# Altium PCB motherboard_PCB.PcbDoc
Units mm, origin at the board's own origin, x right, y up, seen from the top; angles counter-clockwise.
Board outline 96.01 x 77.72 mm, 2 copper layers (Top Layer, Bottom Layer); 77 components, 71 nets, 483 pads, 30 vias.
Unrouted connection lines stored in the file: 98.
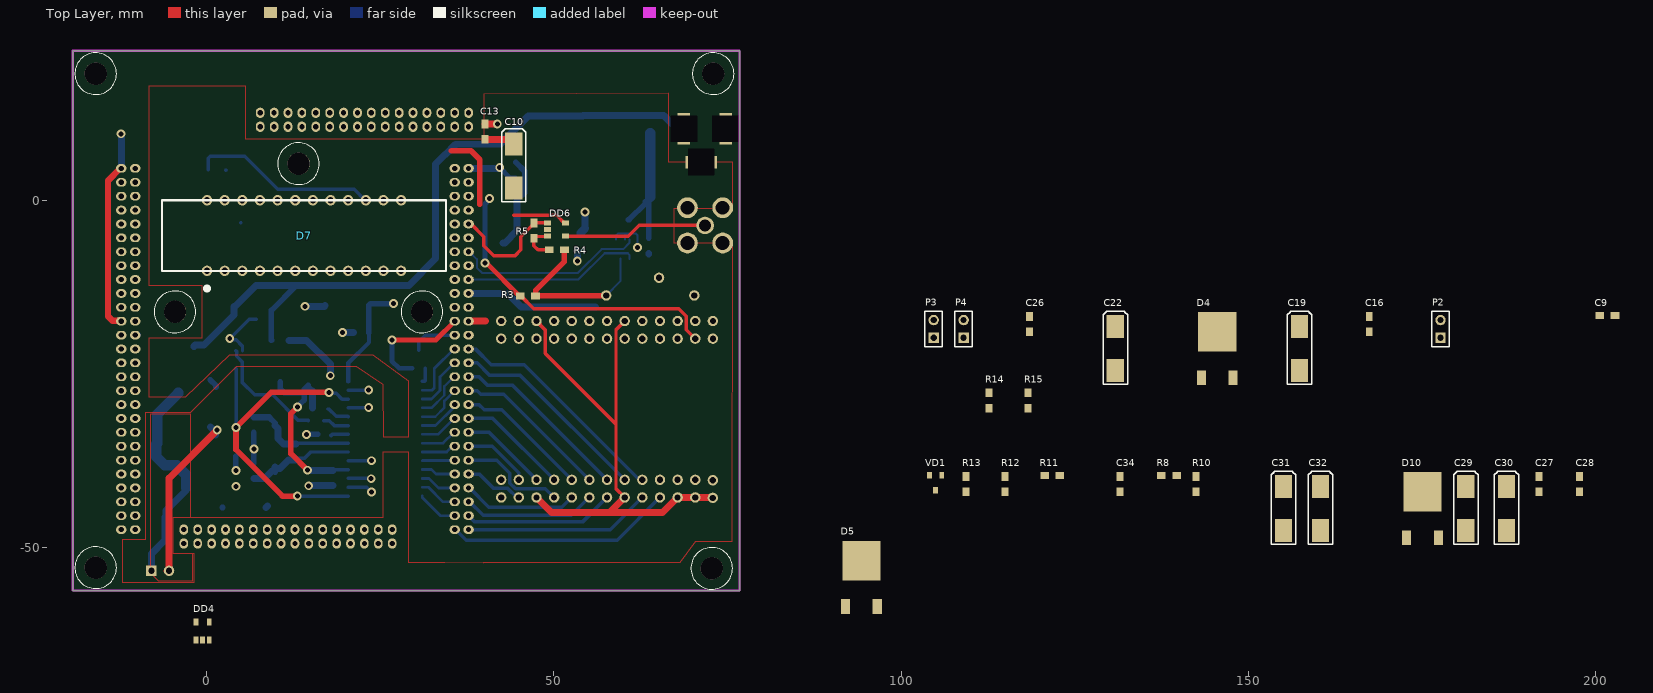
[diagram p0: Top Layer view]
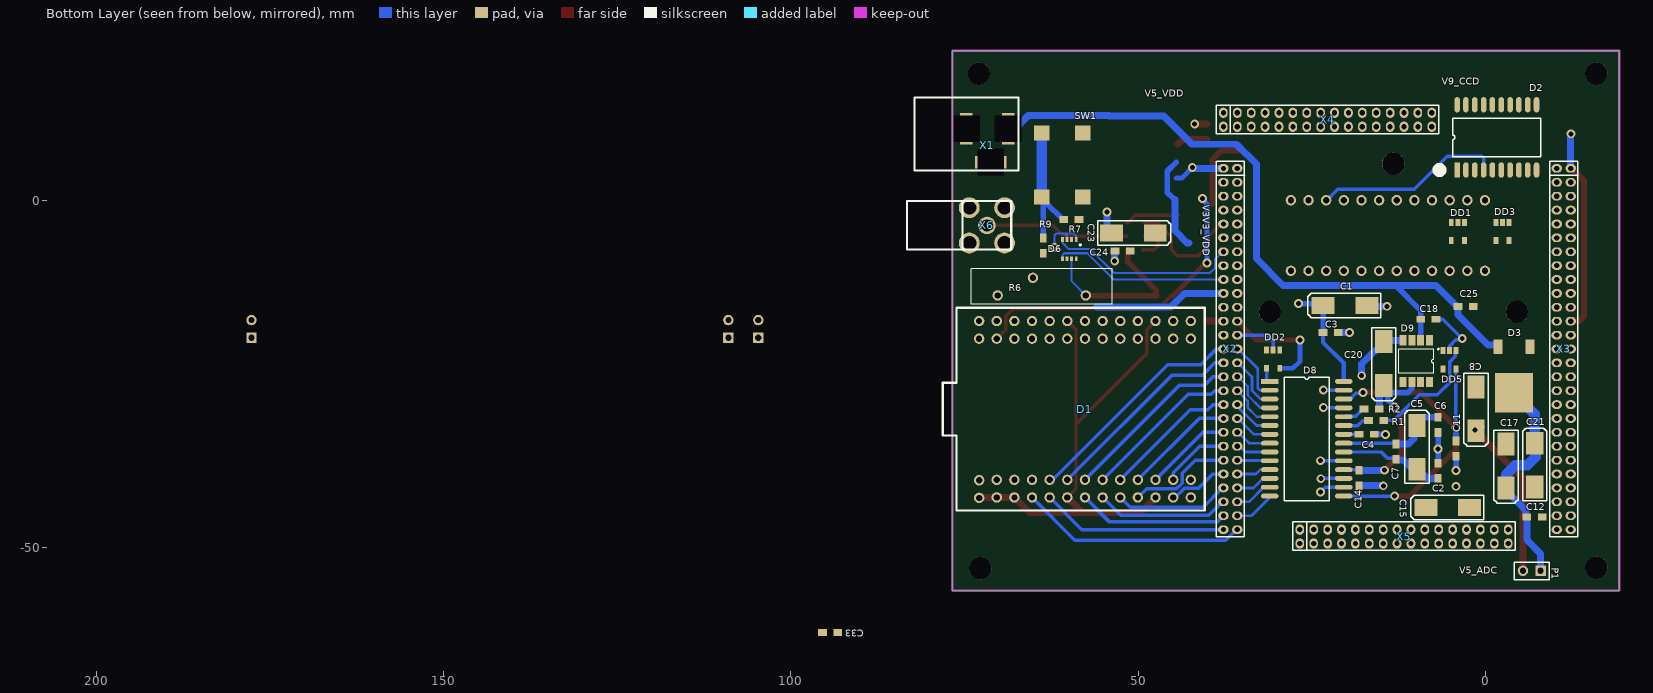
[diagram p1: Bottom Layer view, seen from below]

## Layer stack, top to bottom
Top Solder: solder mask 0.0102, Solder Resist, Dk 3.5
Top Layer: signal copper 0.0356
Dielectric 1: dielectric 0.32, FR-4, Dk 4.8
Bottom Layer: signal copper 0.0356
Bottom Solder: solder mask 0.0102, Solder Resist, Dk 3.5

## Board outline
-19.284,-56.143 -19.284,21.581 76.728,21.581 76.728,-56.143

## Design rules (kind name [scope] priority, off if disabled: settings)
BoardOutlineClearance [All] p1: gap=0.4 ignorepadtopadclearanceinfootprint=FALSE
Clearance [All] p1: gap=0.25 ignorepadtopadclearanceinfootprint=FALSE
HoleSize [All] p1: absolutevalues=TRUE maxlimit=5 minlimit=0.4 maxpercent=80.000 minpercent=20.000
MinimumAnnularRing [All] p1: minimumring=0.2
PolygonConnect [All] p1: connectstyle=Relief reliefconductorwidth=0.254 reliefentries=4 polygonreliefangle="90 Angle" airgapwidth=0.254
RoutingVias [All] p1: holewidth=0.711 width=1.27 viastyle="Through Hole" minholewidth=0.711 minwidth=1.27 maxholewidth=0.711 maxwidth=1.27
SolderMaskExpansion [All] p1: expansion=0.2
Width [All] p1: maxlimit=5 minlimit=0.3 preferedwidth=0.3
29 further rules are at their usual default settings.

## Components (designator, comment, footprint, x,y, rotation, side; value= is the part's Value field where it differs from the comment)
C1 "10,0" TYPE_C 17.063,-15.09 r0 bottom
C2 "0,1" 0805 6.798,-39.988 r90 bottom
C3 "0,1" 0805 21.163,-18.999 r0 bottom
C4 "0,1" 0805 15.999,-33.632 r0 bottom
C5 "10,0" TYPE_C 9.846,-38.668 r90 bottom
C6 "0,1" 0805 6.798,-31.184 r270 bottom
C7 "0,1" 0805 12.839,-35.029 r270 bottom
C8 "10,0" TYPE_C 1.341,-26.831 r270 bottom
C9 "1,0" 0805 200.543,-16.535 r0 top
C10 "10,0" TYPE_C 44.216,1.845 r90 top
C11 "0,1" 0805 4.203,-36.807 r90 bottom
C12 "0,1" 0805 -8.174,-45.577 r0 bottom
C13 "0,1" 0805 40.064,11.03 r270 top
C14 "1,0" 0805 18.173,-41.039 r90 bottom
C15 "10,0" TYPE_C 2.255,-44.18 r0 bottom
C16 "0,1" 0805 167.37,-18.872 r90 top
C17 "10,0" TYPE_C -2.977,-35.061 r270 bottom
C18 "1,0" 0805 7.109,-17.078 r0 bottom
C19 "10,0" TYPE_C 157.337,-24.435 r90 top
C20 "22,0" TYPE_C 14.617,-20.297 r270 bottom
C21 "22,0" TYPE_C -7.117,-41.234 r90 bottom
C22 "22,0" TYPE_C 130.82,-24.435 r90 top
C23 "10,0" TYPE_C 53.818,-4.658 r180 bottom
C24 "0,1" 0805 53.309,-7.274 r180 bottom
C25 "10,0" 0805 3.922,-15.249 r180 bottom
C26 "10,0" 0805 118.475,-18.872 r90 top
C27 "0,1" 0805 191.83,-41.91 r90 top
C28 "0,1" 0805 197.672,-41.91 r90 top
C29 "10,0" TYPE_C 181.289,-47.472 r90 top
C30 "10,0" TYPE_C 187.131,-47.472 r90 top
C31 "22,0" TYPE_C 155.026,-47.472 r90 top
C32 "22,0" TYPE_C 160.36,-47.472 r90 top
C33 "10,0" 0805 95.413,-62.163 r180 bottom
C34 "10,0" 0805 131.48,-41.91 r90 top
D1 "FTD232-USB" ftd232_minimodule 72.881,-17.332 r270 bottom
D2 "BUFFER 5V ->3.3V" SN74LVC244ADWR 4.059,4.41 r90 bottom
D3 "LM1117 5V" TO-252 -6.406,-21.041 r0 bottom
D4 "LM1117 5V" TO-252 143.215,-25.501 r0 top
D5 "LM1117 5V" TO-252 91.968,-58.429 r0 top
D6 "AD5245" AD5245 58.908,-5.572 r270 bottom
D7 "S11639-01" s11639-01 0.051,-10.109 r90 top
D8 "AD9220ARZ" SOP28 31.034,-26.028 r180 bottom
D9 "AD780" SOP8 8.039,-20.113 r270 bottom
D10 "LM1117 3.3V" TO-252 172.755,-48.539 r0 top
DD1 "NC7SZ14M5X" SOT-23-5 2.997,-3.15 r270 bottom
DD2 "NC7SZ14M5X" SOT-23-5 29.596,-21.53 r270 bottom
DD3 "NC7SZ14M5X" SOT-23-5 -3.419,-3.159 r270 bottom
DD4 "AD8605ARTZ" SOT-23-5 -1.529,-63.239 r90 top
DD5 "AD8605ARTZ" SOT-23-5 4.208,-21.608 r270 bottom
DD6 "AD8605ARTZ" SOT-23-5 49.046,-3.215 r0 top
P1 "Header 2" HDR1X2 -7.956,-53.299 r0 bottom
P2 "Header 2" HDR1X2 177.632,-19.736 r90 top
P3 "Header 2" HDR1X2 104.658,-19.736 r90 top
P4 "Header 2" HDR1X2 108.976,-19.736 r90 top
R1 "30" 0805 14.626,-31.667 r0 bottom
R2 "30" 0805 15.262,-30 r0 bottom
R3 "50k" 0805 47.33,-13.725 r180 top
R4 "1k" 0805 49.31,-7.071 r0 top
R5 "100k" 0805 47.1,-5.42 r90 top
R6 "RES_VAR" 3006P 57.508,-11.11 r0 bottom
R7 "10k" 0805 60.701,-2.727 r180 bottom
R8 "2.94k" 0805 137.449,-39.573 r0 top
R9 "100" 0805 63.647,-5.379 r270 bottom
R10 "5k" 0805 142.427,-41.91 r90 top
R11 "10k" 0805 120.634,-39.573 r0 top
R12 "5k" 0805 114.919,-41.91 r90 top
R13 "10k" 0805 109.331,-41.91 r90 top
R14 "10k" 0805 112.659,-29.87 r90 top
R15 "15k" 0805 118.247,-29.87 r90 top
SW1 "BUTTON" BUTTON 60.904,4.969 r90 bottom
VD1 "AD1580" SOT-23 105.826,-39.522 r0 top
X1 "12V POWER" Robiton-DS-210 68.696,10.354 r180 bottom
X2 "CORE_EP4CE10-LEFT" CORE_EP4CE10-LEFT 37.708,4.64 r180 bottom
X3 "CORE_EP4CE10-RIGHT" CORE_EP4CE10-RIGHT -10.292,4.64 r180 bottom
X4 "CORE_EP4CE10-TOP" CORE_EP4CE10-TOP 37.708,10.64 r180 bottom
X5 "CORE_EP4CE10-BOT" CORE_EP4CE10-BOT 26.708,-49.36 r180 bottom
X6 "SMA" SMA 71.75,-3.565 r0 bottom

## Footprints (in the part's own frame and the unit in brackets; to place one, negate y for a bottom-side part, rotate by r counter-clockwise, add the part's x,y. Pads: shape width x height; smd on the part's side, far side on the other; paste and mask are expansions set on the pad)
0805 [mm]
  rect 1.25x1 smd: 1(0,0) 2(2.2,0)
  body extent -0.73,-0.6 2.93,0.6, height 1.25
3006P [mm]
  round 1.5 hole 0.9: 1(0,2.54) 2(7.62,0) 3(12.7,2.54)
  silkscreen extent -3.81,-1.27 16.51,3.81, body extent -3.86,-1.32 18.03,3.86, height 6.35
AD5245 [mm]
  rect 0.7x0.4 smd: 1(0,0) 2(0,-0.65) 3(0,-1.3) 4(0,-1.95) 5(2.8,-1.95) 6(2.8,-1.3) 7(2.8,-0.65) 8(2.8,0)
  silkscreen extent 0.7,0.5 0.9,0.7, body extent -0.45,-2.25 3.25,0.3, height 1.5
BUTTON [mm]
  rect 2.2x2.2 smd: 1(-4.447,2.959) 1(4.753,2.959) 2(-4.447,-2.941) 2(4.753,-2.941)
  body extent -2.97,-2.97 3.28,3.29, height 4.3
CORE_EP4CE10-BOT [mm]
  oval 1.25x1.5 hole 0.75: 1(0,0) 2(0,2) 3(2,0) 4(2,2) 5(4,0) 6(4,2) 7(6,0) 8(6,2) 9(8,0) 10(8,2) 11(10,0) 12(10,2) 13(12,0) 14(12,2) 15(14,0) 16(14,2) 17(16,0) 18(16,2) 19(18,0) 20(18,2) 21(20,0) 22(20,2) 23(22,0) 24(22,2) 25(24,0) 26(24,2) 27(26,0) 28(26,2) 29(28,0) 30(28,2) 31(30,0) 32(30,2)
  silkscreen extent -1,-1 31,3.1, body extent -0.82,-0.95 30.83,2.95, height 6
CORE_EP4CE10-LEFT [mm]
  oval 1.5x1.25 hole 0.75: 1(0,0) 2(2,0) 3(0,-2) 4(2,-2) 5(0,-4) 6(2,-4) 7(0,-6) 8(2,-6) 9(0,-8) 10(2,-8) 11(0,-10) 12(2,-10) 13(0,-12) 14(2,-12) 15(0,-14) 16(2,-14) 17(0,-16) 18(2,-16) 19(0,-18) 20(2,-18) 21(0,-20) 22(2,-20) 23(0,-22) 24(2,-22) 25(0,-24) 26(2,-24) 27(0,-26) 28(2,-26) 29(0,-28) 30(2,-28) 31(0,-30) 32(2,-30) 33(0,-32) 34(2,-32) 35(0,-34) 36(2,-34) 37(0,-36) 38(2,-36) 39(0,-38) 40(2,-38)
  oval 1.5x1.25 hole 0.762: 41(0,-40) 42(2,-40) 43(0,-42) 44(2,-42) 45(0,-44) 46(2,-44) 47(0,-46) 48(2,-46) 49(0,-48) 50(2,-48) 51(0,-50) 52(2,-50) 53(0,-52) 54(2,-52)
  silkscreen extent -1,-53.01 3.05,1, body extent -0.95,-52.82 2.95,0.82, height 6
CORE_EP4CE10-RIGHT [mm]
  oval 1.5x1.25 hole 0.75: 1(0,0) 2(2,0) 3(0,-2) 4(2,-2) 5(0,-4) 6(2,-4) 7(0,-6) 8(2,-6) 9(0,-8) 10(2,-8) 11(0,-10) 12(2,-10) 13(0,-12) 14(2,-12) 15(0,-14) 16(2,-14) 17(0,-16) 18(2,-16) 19(0,-18) 20(2,-18) 21(0,-20) 22(2,-20) 23(0,-22) 24(2,-22) 25(0,-24) 26(2,-24) 27(0,-26) 28(2,-26) 29(0,-28) 30(2,-28) 31(0,-30) 32(2,-30) 33(0,-32) 34(2,-32) 35(0,-34) 36(2,-34) 37(0,-36) 38(2,-36) 39(0,-38) 40(2,-38)
  oval 1.5x1.25 hole 0.762: 41(0,-40) 42(2,-40) 43(0,-42) 44(2,-42) 45(0,-44) 46(2,-44) 47(0,-46) 48(2,-46) 49(0,-48) 50(2,-48) 51(0,-50) 52(2,-50) 53(0,-52) 54(2,-52)
  silkscreen extent -1,-53.01 3.05,1, body extent -0.95,-52.82 2.95,0.82, height 6
CORE_EP4CE10-TOP [mm]
  oval 1.25x1.5 hole 0.75: 1(0,0) 2(0,2) 3(2,0) 4(2,2) 5(4,0) 6(4,2) 7(6,0) 8(6,2) 9(8,0) 10(8,2) 11(10,0) 12(10,2) 13(12,0) 14(12,2) 15(14,0) 16(14,2) 17(16,0) 18(16,2) 19(18,0) 20(18,2) 21(20,0) 22(20,2) 23(22,0) 24(22,2) 25(24,0) 26(24,2) 27(26,0) 28(26,2) 29(28,0) 30(28,2) 31(30,0) 32(30,2)
  silkscreen extent -1,-1 31,3.1, body extent -0.83,-0.95 30.83,2.95, height 6
ftd232_minimodule [mm]
  round 1.5 hole 0.9: 1(25.465,0.01) 2(22.925,0.01) 3(25.4,2.54) 4(22.86,2.54) 5(25.4,5.08) 6(22.86,5.08) 7(25.4,7.62) 8(22.86,7.62) 9(25.4,10.16) 10(22.86,10.16) 11(25.4,12.7) 12(22.86,12.7) 13(25.4,15.24) 14(22.86,15.24) 15(25.4,17.78) 16(22.86,17.78) 17(25.4,20.32) 18(22.86,20.32) 19(25.4,22.86) 20(22.86,22.86) 21(25.4,25.4) 22(22.86,25.4) 23(25.4,27.94) 24(22.86,27.94) 25(25.4,30.48) 26(22.86,30.48) 27(2.54,0) 28(0,0) 29(2.54,2.54) 30(0,2.54) 31(2.54,5.08) 32(0,5.08) 33(2.54,7.62) 34(0,7.62) 35(2.54,10.16) 36(0,10.16) 37(2.54,12.7) 38(0,12.7) 39(2.54,15.24) 40(0,15.24) 41(2.54,17.78) 42(0,17.78) 43(2.54,20.32) 44(0,20.32) 45(2.54,22.86) 46(0,22.86) 47(2.54,25.4) 48(0,25.4) 49(2.54,27.94) 50(0,27.94) 51(2.54,30.48) 52(0,30.48)
  silkscreen extent -1.91,-5.23 27.31,32.49, body extent -1.89,-5.26 27.32,32.49, height 8.2
HDR1X2 [mm] "Connector; Header; 2 Position"
  rect 1.5x1.5 hole 0.9: 1(0,0)
  round 1.5 hole 0.9: 2(2.54,0)
  silkscreen extent -1.27,-1.27 3.81,1.27
Robiton-DS-210 [mm]
  rect 1.8x4.5 hole 3.8 square: 1(0,0) 2(-6,0)
  rect 4.5x1.8 hole 3.8 square: 2(-2.5,-4.8)
  silkscreen extent -13.5,-6 1.5,4.5, body extent -13.63,-6.13 1.63,4.63, height 11
s11639-01 [mm] "CMOS linear image sensor"
  round 1.5 hole 0.9: 1(0,0) 2(0,-2.54) 3(0,-5.08) 4(0,-7.62) 5(0,-10.16) 6(0,-12.7) 7(0,-15.24) 8(0,-17.78) 9(0,-20.32) 10(0,-22.86) 11(0,-25.4) 12(0,-27.94) 13(10.16,-27.94) 14(10.16,-25.4) 15(10.16,-22.86) 16(10.16,-20.32) 17(10.16,-17.78) 18(10.16,-15.24) 19(10.16,-12.7) 20(10.16,-10.16) 21(10.16,-7.62) 22(10.16,-5.08) 23(10.16,-2.54) 24(10.16,0)
  silkscreen extent -2.62,-34.42 10.16,6.48, body extent -0.02,-34.37 10.13,6.48, height 4.85
SMA [mm]
  round 3 hole 2: 1(-2.54,-2.54) 1(-2.54,2.54) 1(2.54,-2.54) 1(2.54,2.54)
  oval 2.55x2.5 hole 1.7: 2(0,0)
  silkscreen extent -3.5,-3.5 11.5,3.5, body extent -3.5,-3.5 11.5,3.5, height 9.9
SN74LVC244ADWR [mm]
  rect 2.2x0.8 smd: 1(0,0)
  oval 2.2x0.8 smd: 2(0,-1.27) 3(0,-2.54) 4(0,-3.81) 5(0,-5.08) 6(0,-6.35) 7(0,-7.62) 8(0,-8.89) 9(0,-10.16) 10(0,-11.43) 11(9.4,-11.43) 12(9.4,-10.16) 13(9.4,-8.89) 14(9.4,-7.62) 15(9.4,-6.35) 16(9.4,-5.08) 17(9.4,-3.81) 18(9.4,-2.54) 19(9.4,-1.27) 20(9.4,0)
  silkscreen extent -0.25,-12.06 7.46,2.79, body extent 1.93,-12.07 7.47,0.64, height 2.7
SOP8 [mm]
  rect 1.5x1 smd: 1(0,0) 2(0,-1.27) 3(0,-2.54) 4(0,-3.81) 5(6,-3.81) 6(6,-2.54) 7(6,-1.27) 8(6,0)
  silkscreen extent 1.17,-4.45 4.72,1.37, body extent 1.28,-4.45 4.72,0.64, height 1.75
SOP28 [mm]
  rect 2.5x0.7 smd: 1(0,0)
  oval 2.5x0.7 smd: 2(0,-1.27) 3(0,-2.54) 4(0,-3.81) 5(0,-5.08) 6(0,-6.35) 7(0,-7.62) 8(0,-8.89) 9(0,-10.16) 10(0,-11.43) 11(0,-12.7) 12(0,-13.97) 13(0,-15.24) 14(0,-16.51) 15(10.65,-16.51) 16(10.65,-15.24) 17(10.65,-13.97) 18(10.65,-12.7) 19(10.65,-11.43) 20(10.65,-10.16) 21(10.65,-8.89) 22(10.65,-7.62) 23(10.65,-6.35) 24(10.65,-5.08) 25(10.65,-3.81) 26(10.65,-2.54) 27(10.65,-1.27) 28(10.65,0)
  silkscreen extent 2.08,-17.15 8.56,0.63, body extent 2.08,-17.15 8.57,0.64, height 1.8
SOT-23 [mm]
  rect 0.7x0.9 smd: 1(0,0) 2(-1.778,0) 3(-0.889,-2.159)
  body extent -2.54,-2.16 0.76,0, height 1.45
SOT-23-5 [mm]
  rect 1x0.7 smd: 1(0,0) 2(0,-0.95) 3(0,-1.9) 4(2.6,-1.9) 5(2.6,0)
  body extent -0.6,-2.35 3.2,0.45, height 1.45
TO-252 [mm]
  rect 1.3x2.15 smd: 1(0,0) 3(4.572,0)
  rect 5.5x5.7 smd: 2(2.286,6.604)
  body extent -0.75,-1.18 5.32,9.56, height 2.55
TYPE_C [mm]
  rect 3.3x2.5 smd: 1(0,0) 2(6.3,0)
  silkscreen extent -2,-1.75 8.5,1.75, body extent -1.75,-1.35 8.05,1.35, height 2.5

## Part data
C1 C5 C8 C10 C15 C17 C19 C20 C21 C22 C23 C29 C30 C31 C32: library part CAP_TANT, "SMD"
C2 C3 C4 C6 C7 C9 C11 C12 C13 C14 C16 C18 C24 C25 C26 C27 C28 C33 C34: library part CAP_SMALL, "0805"
D1: library part ftd232_minimodule
D2: library part SN74LVC244ADWR
D3 D4 D5 D10: library part LM1117_FIX, "LM1117-FIX"
P1 P2 P3 P4: "Header, 2-Pin", LatestRevisionDate=17-Jul-2002, LatestRevisionNote="Re-released for DXP Platform.", Publisher="Altium Limited"
R1 R2 R3 R4 R5 R7 R8 R9 R10 R11 R12 R13 R14 R15: library part RES0805, "0805"
R6: "PV36W102C (СП5-2ВБ) 1 кОм"
X1: library part ROBITON_12V

## Free pads (board coordinates)
  round 3.2 hole 3.2: ""(-15.982,-52.841) ""(-15.982,18.279) ""(-4.552,-16.011) ""(13.228,5.325) ""(31.008,-16.011) ""(72.708,-52.94) ""(72.918,18.279)

## Via types
v1: diameter 1.27, hole 0.72, Top Layer to Bottom Layer, 20 vias
v2: diameter 1.27, hole 0.711, Top Layer to Bottom Layer, 10 vias

## Nets (pads, with @x,y where several pads share a name; then routed paths per layer and width w, separated by ;. In a path a pad name is that pad's centre, name@x,y a point inside that pad or via, vN(x,y) a via of type N, cw(c..) or ccw(c..) an arc to the next point about the centre after c; other vN are vias at no path point)
ADC_CLK: D8.1 DD2.4 | length 2.3
  Bottom Layer w0.5: D8.1 31.396,-26.028 31.496,-25.928 DD2.4
ADC_DATA1: D8.13 X2.50 | length 5.5
  Bottom Layer w0.4: D8.13 31.931,-41.268 34.024,-43.36 X2.50
ADC_DATA2: D8.12 X2.48 | length 5.2
  Bottom Layer w0.4: D8.12 32.007,-39.998 33.37,-41.36 X2.48
ADC_DATA3: D8.11 X2.46 | length 4.9
  Bottom Layer w0.4: D8.11 32.363,-38.728 32.995,-39.36 X2.46
ADC_DATA4: D8.10 X2.44 | length 4.7
  Bottom Layer w0.4: D8.10 31.072,-37.42 35.649,-37.42 X2.44
ADC_DATA5: D8.9 X2.42 | length 5
  Bottom Layer w0.4: D8.9 34.552,-36.188 35.38,-35.36 X2.42
ADC_DATA6: D8.8 X2.40 | length 5.3
  Bottom Layer w0.4: D8.8 34.025,-34.918 35.583,-33.36 X2.40
ADC_DATA7: D8.7 X2.38 | length 5.6
  Bottom Layer w0.4: D8.7 33.295,-33.648 35.583,-31.36 X2.38
ADC_DATA8: D8.6 X2.36 | length 6.1
  Bottom Layer w0.4: D8.6 32.955,-32.378 35.584,-29.749 35.584,-29.485 X2.36
ADC_DATA9: D8.5 X2.34 | length 6.8
  Bottom Layer w0.35: D8.5 32.904,-31.108 34.234,-29.778 34.234,-28.834 X2.34
ADC_DATA10: D8.4 X2.32 | length 7.3
  Bottom Layer w0.35: D8.4 32.382,-29.838 34.208,-28.011 34.208,-26.735 35.583,-25.36 X2.32
ADC_DATA11: D8.3 X2.30 | length 8
  Bottom Layer w0.4: D8.3 32.355,-28.568 33.573,-27.35 33.573,-25.37 35.583,-23.36 X2.30
ADC_DATA12: D8.2 X2.28 | length 8.8
  Bottom Layer w0.4: D8.2 32.422,-27.298 32.761,-26.959 32.761,-24.183 35.583,-21.36 X2.28
BUTTON_1: R9.2 X2.19 | length 19.2
  Bottom Layer w1: X2.19 43.325,-13.36 45.29,-15.326 55.976,-15.326 ; R9.2@63.647,-7.704 R9.2
CAPB: C2.1 C5.1 C7.2 D8.20 | length 15.4
  Bottom Layer w0.5: C7.2 12.987,-37.081 14.089,-37.081 14.982,-36.188 D8.20
  Bottom Layer w0.8: C5.1@9.418,-38.922 9.7,-38.922 C5.1@9.846,-39.068
  Bottom Layer w1: C2.1 8.353,-39.988 C5.1@9.418,-38.922 ; C5.1@9.846,-38.419 9.846,-38.319 10.112,-38.585 10.553,-38.585 11.784,-37.354 12.839,-37.354 C7.2
CAPT: C5.2 C6.1 C7.1 D8.21 | length 16.3
  Bottom Layer w0.5: C7.1 12.95,-34.918 D8.21
  Bottom Layer w0.8: C5.2@8.996,-31.184 9.846,-32.034 C5.2
  Bottom Layer w1: C6.1 C5.2@8.996,-31.184 ; C5.2 10.299,-32.821 10.299,-34.267 11.061,-35.029 C7.1
CLKOUT: D1.24 X2.41 | length 9.8
  Bottom Layer w0.5: X2.41 41.125,-35.36 44.941,-39.176 D1.24
CML: C4.2 D8.22 | length 2.6
  Bottom Layer w0.5: C4.2@17.858,-33.791 17.902,-33.835 18.076,-33.661 20.371,-33.661 D8.22
FPGA_ADC_CLK: DD2.2 X2.26 | length 6.8
  Bottom Layer w0.5: DD2.2 30.546,-20.28 31.466,-19.36 X2.26
FPGA_EOS: D2.16 X2.12
FPGA_LIS_CLK: DD1.2 X3.7
FPGA_LIS_ST: DD3.2 X3.9
FPGA_TRIG: D2.18 X2.10
GND: C1.1 C2.2 C3.1 C4.1 C6.2 C8.1 C9.2 C10.1 C11.1 C12.1 C13.1 C14.1 C15.1 C16.1 C17.1 C18.1 C19.1 C20.1 C21.1 C22.1 C23.1 C24.1 C25.2 C26.2 C27.1 C28.1 C29.1 C30.1 C31.1 C32.1 C33.2 C34.2 D1.2 D1.4 D1.6 D1.28 D1.30 D2.1 D2.10 D3.1 D4.1 D5.1 D6.1 D6.3 D6.6 D7.2 D7.11 D8.16 D8.17 D8.19 D8.25 D8.27 D9.4 D10.1 DD1.3 DD2.3 DD3.3 DD4.2 DD5.2 DD6.2 R6.2 R13.2 R14.1 SW1.2 VD1.2 X1.2 X2.1 X2.23 X3.2 X3.24 X6.1 | length 103.8
  Top Layer w0.9: X3.24 -12.359,-17.293 -13.557,-17.293 -14.204,-16.646 -14.204,2.853 -12.417,4.64 X3.2
  Top Layer w1: X2.23 40.124,-17.36 40.152,-17.332 ; C13.1 v1(41.842,11.03)
  Bottom Layer w0.3: X3.24 X3.24@-12.167,-17.36 ; D6.1 58.908,-5.054 59.253,-4.708 60.599,-4.708 ; D6.3 60.208,-5.1 60.599,-4.708 ; v2(62.021,-6.74) 62.021,-4.988 61.742,-4.708 60.599,-4.708
  Bottom Layer w0.5: DD1.3 DD1.3@4.914,-3.167 ; DD5.2 5.158,-20.947 4.231,-20.02 v2@3.469,-20.02 ; C18.1 6.116,-17.078 v2(3.322,-19.872) ; C14.1 C14.1@18.364,-41.23 ; D8.16@20.346,-41.23 D8.16 23.066,-41.268 v1(23.736,-41.938) ; D8.17 23.65,-39.998 v1(23.685,-40.033) ; D8.19 20.4,-37.442 v1@23.634,-37.442 ; D8.25 23.288,-29.838 v1(23.33,-29.796) ; D8.27 23.288,-27.298 v1(23.33,-27.256) ; v1@23.558,-37.518 v1@23.634,-37.442 ; v1(23.711,-37.442) v1@23.634,-37.442 ; v2(3.322,-19.872) v2@3.469,-20.02 ; v2(3.322,-19.872) 3.175,-20.02 v2@3.469,-20.02
  Bottom Layer w0.7: v2(42.184,4.766) 43.708,3.242 44.495,3.242 44.521,3.216
  Bottom Layer w0.8: X3.2 X3.2@-12.292,4.9 ; C8.1@0.491,-25.79 1.341,-26.64 C8.1 ; C15.1 C15.1@2.343,-44.18 ; v1(4.203,-38.839) C11.1 ; C2.2 6.809,-37.777 6.809,-35.751 v1(6.82,-35.74) 6.809,-35.729 6.809,-33.395 C6.2 ; v1@14.414,-33.632 C4.1
  Bottom Layer w1: v2(-12.324,9.617) -12.287,9.58 -12.287,4.64 X3.2 ; D9.4 14.371,-20.113 17.8,-23.542 v1(17.8,-25.206) ; v1(14.363,-33.683) v1@14.414,-33.632 ; v1@14.529,-15.217 16.936,-15.217 C1.1 ; v1(14.694,-41.049) 14.703,-41.039 C14.1 ; v1@20.063,-18.999 C3.1 C3.1@21.168,-18.999 ; X2.23 X2.23@37.72,-17.348 ; X2.1 41.985,4.64 42.111,4.766 v2(42.184,4.766) ; C24.1 53.36,-7.274 v2(53.36,-8.696) ; C23.1@54.475,-4.001 54.475,-1.663 v2(54.478,-1.66)
  Bottom Layer w1.2: C23.1 C23.1@54.475,-4.001
  other v1: 4.236,-41.132 19.563,-18.999 14.148,-15.217
LIS_CLK: D7.3 DD1.4
LIS_EOS: D2.4 D7.15 | length 27.1
  Bottom Layer w0.5: D2.4 0.249,6.099 0.541,6.391 5.481,6.391 10.256,1.616 21.244,1.616 D7.15@22.86,0
LIS_ST: D7.24 DD3.4 | length 0
  Top Layer w0.5: D7.24@0,0 D7.24@0.01,-0.01
LIS_TRIG: D2.2 D7.23 | length 0.4
  Bottom Layer w0.5: D7.23@2.54,0 D7.23@2.731,0.191 ; D2.2@2.731,4.353 D2.2
LIS_Vout: D7.13 R10.2
NetC9_1: C9.1 D7.22 | length 0
  Bottom Layer w1: D7.22 D7.22@5.135,0.055
NetC12_2: C12.2 C17.2 C21.2 D3.2 P1.1 | length 34.7
  Top Layer w1: P1.1@-8.206,-53.049 P1.1
  Bottom Layer w1: P1.1 -7.956,-50.835 -5.974,-48.854 C12.2 -5.849,-45.577 -5.849,-44.633 -2.977,-41.761 C17.2 ; D3.2@-5.873,-29.397 D3.2
  Bottom Layer w1.5: D3.2 -4.12,-27.745 -7.117,-30.742 C21.2 -7.27,-35.087 -7.27,-36.865 -6.051,-38.084 -4.323,-38.084 -2.977,-39.43 C17.2
NetC16_2: C16.2 C19.2 C22.2 D4.2 P2.1
NetC27_2: C27.2 C29.2 C31.2 D5.2 P3.1
NetC28_2: C28.2 C30.2 C32.2 D10.2 P4.1
NetDD4_3: DD4.3 R10.1 R13.1
NetDD4_4: DD4.4 R11.2 R12.1
NetDD5_1: DD5.1 R1.1 R15.2 | length 16.7
  Bottom Layer w0.5: DD5.1 4.308,-21.708 4.308,-22.408 5.151,-23.25 5.151,-26.197 6.921,-27.968 9.487,-27.968 13.17,-31.651 14.61,-31.651 R1.1
NetDD5_4: DD5.4 R14.2 R15.1
NetDD6_3: DD6.3 R4.1 R5.1 | length 5.2
  Top Layer w0.5: R5.1 47.1,-6.47 47.701,-7.071 R4.1 ; R5.1@47.35,-5.166 48.996,-5.166 DD6.3
NetDD6_4: DD6.4 X6.2 | length 20.7
  Top Layer w0.5: DD6.4 60.715,-5.115 62.265,-3.565 X6.2
NetR7_1: R7.1 R9.1 SW1.1 | length 19.5
  Bottom Layer w0.8: R7.1 60.826,-2.727 63.163,-0.39 63.163,-0.178 SW1.1@63.647,0.306 ; R9.1 SW1.1@63.647,0.306 ; SW1.1@63.863,0.522 SW1.1@63.647,0.306
  Bottom Layer w1.5: SW1.1@63.863,0.522 SW1.1@63.863,9.722
NetR8_1: R8.1 R11.1 VD1.1
OTR: D8.14 X2.52 | length 6
  Bottom Layer w0.4: D8.14 31.034,-42.758 33.636,-45.36 X2.52
POT_B: D6.7 R3.1 R4.2 R6.1 | length 24.7
  Top Layer w0.8: R3.1 R3.1@47.368,-13.688 ; R4.2 51.51,-8.769 47.368,-12.91 R3.1@47.368,-13.688 ; R6.1 57.47,-13.688 R3.1@47.368,-13.688
  Bottom Layer w0.3: R6.1 59.558,-11.601 D6.7
SCL: D6.4 X2.13 | length 27.4
  Bottom Layer w0.3: X2.13 37.833,-7.36 38.907,-8.435 38.907,-9.661 39.644,-10.398 53.462,-10.398 56.871,-6.988 59.97,-6.988 60.858,-6.101 D6.4
SDA: D6.5 X2.17 | length 25.4
  Bottom Layer w0.3: X2.17 53.515,-11.36 57.297,-7.579 60.624,-7.579 60.858,-7.812 D6.5
TRIGGER: DD6.1 R5.2 X2.9 | length 17.2
  Top Layer w0.5: X2.9@37.756,-3.312 X2.9 38.067,-3.36 39.898,-5.191 39.898,-6.512 41.32,-7.934 44.394,-7.934 45.232,-7.096 45.232,-5.172 46.353,-4.052 46.393,-4.052 47.1,-3.345 R5.2 47.102,-3.217 49.044,-3.217 DD6.1
USB_DATA0: D1.7 X2.54 | length 32.7
  Bottom Layer w0.5: X2.54 35.833,-47.36 37.377,-48.904 59.089,-48.904 D1.7
USB_DATA1: D1.10 X2.27 | length 32.8
  Bottom Layer w0.5: X2.27 38.708,-21.36 40.958,-23.61 45.708,-23.61 62.29,-40.192 D1.10
USB_DATA2: D1.9 X2.53 | length 26.9
  Bottom Layer w0.5: X2.53 58.093,-47.36 D1.9
USB_DATA3: D1.12 X2.29 | length 29.4
  Bottom Layer w0.5: X2.29 38.958,-23.36 40.708,-25.11 45.099,-25.11 D1.12
USB_DATA4: D1.14 X2.31 | length 26.1
  Bottom Layer w0.5: X2.31 39.208,-25.36 40.458,-26.61 44.059,-26.61 D1.14
USB_DATA5: D1.13 X2.51 | length 21.8
  Bottom Layer w0.5: X2.51 38.611,-46.263 54.11,-46.263 D1.13
USB_DATA6: D1.16 X2.33 | length 22.7
  Bottom Layer w0.5: X2.33 38.958,-27.36 39.458,-27.86 42.769,-27.86 D1.16
USB_DATA7: D1.15 X2.49 | length 19.3
  Bottom Layer w0.5: X2.49 37.833,-43.36 39.796,-45.323 52.51,-45.323 D1.15
USB_OE#: D1.23 X2.45 | length 8.6
  Bottom Layer w0.5: X2.45 39.257,-39.36 41.339,-41.442 43.352,-41.442 44.642,-42.732 D1.23
USB_RD#: D1.20 X2.37 | length 16
  Bottom Layer w0.5: X2.37 41.189,-31.36 D1.20
USB_RXF#: D1.18 X2.35 | length 19.3
  Bottom Layer w0.5: X2.35 39.208,-29.36 39.958,-30.11 42.479,-30.11 D1.18
USB_SIWUA: D1.22 X2.39 | length 12.6
  Bottom Layer w0.5: X2.39 40.649,-33.36 D1.22
USB_TXE#: D1.17 X2.47 | length 16.6
  Bottom Layer w0.5: X2.47 37.833,-41.36 40.627,-44.155 51.138,-44.155 D1.17
USB_WR#: D1.19 X2.43 | length 15.4
  Bottom Layer w0.5: X2.43 41.779,-37.36 43.651,-39.232 43.651,-40.67 44.463,-41.482 48.771,-41.482 D1.19
V2,5_REF: C14.2 C15.2 C20.2 D8.18 D9.6 R2.1 | length 28.5
  Top Layer w0.8: v1(13.068,-29.72) 12.136,-30.652 12.136,-36.433 v1(14.516,-38.813)
  Bottom Layer w0.5: C14.2 18.246,-38.766 20.346,-38.766 D8.18
  Bottom Layer w0.8: D9.6 10.579,-27.069 11.147,-27.637 13.767,-27.637 C20.2@14.033,-27.372 ; v1(13.068,-29.72) 13.068,-29.669 14.033,-28.704 C20.2@14.033,-27.372 ; C20.2@14.617,-26.787 C20.2@15.252,-27.422 ; C20.2 14.033,-27.181 C20.2@14.033,-27.372
  Bottom Layer w1: C15.2 C15.2@8.758,-43.977 ; v1(14.516,-38.813) 14.529,-38.826 16.395,-38.826 16.395,-38.839 C14.2 ; R2.1@15.252,-29.847 C20.2@15.252,-27.422
V3V3_USB: D1.1 D1.3 D1.5 D1.11 D1.21 D1.38 D1.48 | length 76.5
  Top Layer w0.5: D1.48 48.771,-18.622 48.771,-22.006 58.931,-32.166 ; D1.11 58.931,-41.482 58.931,-32.166 ; D1.38 58.931,-18.582 58.931,-32.166
  Top Layer w0.6: D1.1@72.838,-42.765 D1.1
  Top Layer w1: D1.21 49.64,-44.891 58.022,-44.891 ; D1.11 58.022,-44.891 ; D1.1@72.838,-42.765 70.373,-42.765 D1.3 D1.5 65.642,-44.891 58.022,-44.891
  Bottom Layer w1: D1.21 D1.21@47.576,-42.828 ; D1.11@60.181,-42.808 D1.11 ; D1.3 D1.3@70.373,-42.765
V3V3_VDD: C1.2 C3.2 C23.2 C24.2 D2.20 D6.2 D8.28 DD6.5 P4.2 R7.2 | length 34.8
  Top Layer w0.5: 44.188,-2.095 50.376,-2.095 51.496,-3.215 DD6.5
  Top Layer w0.8: 35.25,7.179 38.044,7.179 39.339,5.883 39.339,-0.517
  Bottom Layer w0.6: D8.28 20.384,-23.378 23.363,-20.399 C3.2
  Bottom Layer w0.8: C3.2 C1.2 23.585,-14.868 26.868,-14.868 v2(26.906,-14.83)
V5_ADC: C8.2 C11.2 D8.15 D8.26 DD4.5 DD5.5 P1.2 | length 75.8
  Top Layer w0.8: v2(13.05,-42.529) 10.917,-42.529 4.223,-35.835 v1(4.223,-32.662) 9.273,-27.612 v1(17.589,-27.612)
  Top Layer w1: P1.2@-5.695,-53.299 P1.2@-5.677,-53.28 ; P1.2 -5.416,-39.913 -5.365,-39.913 v1(1.519,-33.029)
  Bottom Layer w0.5: DD5.5 4.225,-24.225 4.225,-32.659 v1(4.223,-32.662) ; v2(13.05,-42.529) 13.059,-42.538 D8.15 ; v1(17.589,-27.612) 17.737,-27.759 18.676,-27.759 19.484,-28.568 D8.26
  Bottom Layer w0.8: C11.2 4.223,-34.587 v1(4.223,-32.662)
  Bottom Layer w1: C8.2@0.54,-32.565 1.29,-33.315 C8.2@1.29,-33.715
V5_LIS: C10.2 C13.2 D7.1 D7.12 DD1.5 DD3.5 P2.2 | length 4.4
  Top Layer w1: C13.2 43.531,8.83 C10.2
V5_VDD: D1.29 DD2.5 P3.2 R3.2 R8.2 X2.24 X3.23 | length 62.1
  Top Layer w0.5: R3.2 45.255,-13.725 47.11,-15.58 67.965,-15.58 69.057,-16.672 69.057,-18.589 D1.29
  Top Layer w0.7: X3.23 X3.23@-10.167,-17.36 ; v1(26.67,-20.066) 33.002,-20.066 X2.24 ; v2(40.076,-9.001) 40.185,-9.11 40.39,-9.11 45.005,-13.725 R3.2
  Bottom Layer w0.7: v1(26.67,-20.066) 26.67,-23.103 27.697,-24.13 DD2.5 ; v2(40.076,-9.001) 40.076,-0.488 40.708,0.144 v2(40.708,0.298)
V12: C18.2 C25.1 C26.1 C33.1 C34.1 D3.3 D4.3 D5.3 D9.2 D10.3 X1.1 | length 105.3
  Top Layer w0.8: X1.1@68.346,9.566 68.696,9.916 X1.1
  Bottom Layer w0.8: D9.2@9.334,-20.088 D9.2 C18.2 9.309,-15.79 12.898,-12.201
  Bottom Layer w1: D3.3 -1.834,-20.911 -1.684,-20.761 -0.361,-20.761 3.922,-16.478 C25.1 4.047,-15.249 7.095,-12.201 12.898,-12.201 29.103,-12.201 32.96,-8.345 32.96,3.826 32.96,5.27 34.33,6.64 34.381,6.64 35.859,8.119 42.209,8.119 46.295,12.204 54.169,12.204 54.198,12.233 65.806,12.233 67.051,10.989 68.182,10.989 68.696,11.503 X1.1
V_diff: DD4.1 DD5.3 R12.2
VINA: D8.23 R1.2 | length 3.9
  Bottom Layer w0.5: R1.2 17.673,-31.667 18.384,-32.378 D8.23
VINB: D8.24 R2.2 | length 3.4
  Bottom Layer w0.5: R2.2 17.587,-30 18.657,-31.07 20.346,-31.07 D8.24
pads on no net: D1.8 D1.25 D1.26 D1.27 D1.31 D1.32 D1.33 D1.34 D1.35 D1.36 D1.37 D1.39 D1.40 D1.41 D1.42 D1.43 D1.44 D1.45 D1.46 D1.47 D1.49 D1.50 D1.51 D1.52 D2.3 D2.5 D2.6 D2.7 D2.8 D2.9 D2.11 D2.12 D2.13 D2.14 D2.15 D2.17 D2.19 D6.8 D7.4 D7.5 D7.6 D7.7 D7.8 D7.9 D7.10 D7.14 D7.16 D7.17 D7.18 D7.19 D7.20 D7.21 D9.1 D9.3 D9.5 D9.7 D9.8 DD1.1 DD2.1 DD3.1 R6.3 VD1.3 X2.2 X2.3 X2.4 X2.5 X2.6 X2.7 X2.8 X2.11 X2.14 X2.15 X2.16 X2.18 X2.20 X2.21 X2.22 X2.25 X3.1 X3.3 X3.4 X3.5 X3.6 X3.8 X3.10 X3.11 X3.12 X3.13 X3.14 X3.15 X3.16 X3.17 X3.18 X3.19 X3.20 X3.21 X3.22 X3.25 X3.26 X3.27 X3.28 X3.29 X3.30 X3.31 X3.32 X3.33 X3.34 X3.35 X3.36 X3.37 X3.38 X3.39 X3.40 X3.41 X3.42 X3.43 X3.44 X3.45 X3.46 X3.47 X3.48 X3.49 X3.50 X3.51 X3.52 X3.53 X3.54 X4.1 X4.2 X4.3 X4.4 X4.5 X4.6 X4.7 X4.8 X4.9 X4.10 X4.11 X4.12 X4.13 X4.14 X4.15 X4.16 X4.17 X4.18 X4.19 X4.20 X4.21 X4.22 X4.23 X4.24 X4.25 X4.26 X4.27 X4.28 X4.29 X4.30 X4.31 X4.32 X5.1 X5.2 X5.3 X5.4 X5.5 X5.6 X5.7 X5.8 X5.9 X5.10 X5.11 X5.12 X5.13 X5.14 X5.15 X5.16 X5.17 X5.18 X5.19 X5.20 X5.21 X5.22 X5.23 X5.24 X5.25 X5.26 X5.27 X5.28 X5.29 X5.30 X5.31 X5.32
copper on no net: | length 13.9
  Bottom Layer w0.8: 44.521,5.502 45.791,4.232 45.791,1.163 44.771,0.143 44.699,0.143
  Bottom Layer w1: -10.292,-19.36 -9.981,-19.36 ; 42.692,-6.106 42.92,-6.106 44.699,-4.327 44.699,0.143

## Polygon pours and split planes (outlines as drawn)
no net on Bottom Layer "Bottom Layer-No Net" (solid, pour order 4): -23.698,-44.628
no net on Bottom Layer "Bottom Layer-No Net 1" (solid, pour order 2): -23.698,-44.628
GND on Top Layer "Top Layer-GND" (hatched 45Degree grid 0.508 track 0.25, remove dead copper, shelved, pour order 12): -12.179,-48.818 -12.163,-54.924 -7.415,-54.924 -1.758,-54.924 -1.758,-50.86 -4.806,-50.86 -4.806,-45.573 25.445,-45.573 25.445,-36.128 28.992,-36.128 28.992,-52.075 34.31,-52.075 39.898,-52.13 39.898,-52.075 68.208,-52.075 70.378,-49.04 75.69,-49.04 75.746,-6.156 67.33,-6.156 67.33,-1.076 75.733,-1.076 75.716,5.554 74.188,5.554 66.522,5.554 66.522,15.434 39.898,15.346 39.898,8.83 5.608,8.83 5.608,16.45 -8.362,16.45 -8.362,-12.201 -0.742,-12.201 -0.742,-19.821 -8.362,-19.821 -8.362,-20.36 -8.319,-28.254 -3.028,-28.254 3.301,-22.158 23.896,-22.158 28.992,-25.917 28.992,-34.096 25.497,-34.096 25.445,-26.476 21.61,-23.936 4.227,-23.936 -2.377,-30.54 -8.87,-30.54 -8.87,-48.827
GND on Top Layer "Top Layer-GND 1" (hatched 45Degree grid 0.508 track 0.203, remove dead copper, shelved, pour order 8): -8.133,-53.56 -6.997,-54.696 -1.987,-54.696 -1.987,-50.86 -4.806,-50.86 -4.806,-45.573 -2.292,-45.573 -2.292,-30.769 -8.133,-30.769

## Keep-outs
Keep-Out Layer:
  the board outline again, w0.3

## Other copper
Top Layer:
  pour cut-out: 9.418,9.643 17.038,9.643 17.038,1.515 9.418,1.515
  pour cut-out: 34.31,-52.075 39.706,-52.075
  pour cut-out: 26.182,-18.856 33.989,-19.1 34.226,-48.828 39.666,-48.828 38.993,6.036 34.295,6.036 34.31,-12.506 26.182,-12.506

## Silkscreen, mask and mechanical layers (free items; w line width, h text height)
Top Overlay:
  circle w0.1: c13.228,5.325 r3
  circle w0.1: c-15.982,18.279 r3
  circle w0.1: c-15.982,-52.841 r3
  circle w0.1: c-4.552,-16.011 r3
  circle w0.1: c31.008,-16.011 r3
  circle w0.1: c72.918,18.279 r3
  circle w0.1: c72.708,-52.94 r3
Bottom Overlay:
  text "V9_CCD" at 6.294,16.678 h1
  text "V5_VDD" at 49.042,14.926 h1
  text "V3V3_VDD" at 40.66,-0.568 h1 r90
  text "V5_ADC" at 3.779,-53.705 h1
Mechanical 3:
  lines w0.3: -13.35,7.133 6.716,7.133 6.716,16.15 -0.777,16.15 -0.777,14.88 5.573,14.88 5.573,8.276 -12.207,8.276 -12.207,14.88 -5.857,14.88 -5.857,16.15 -13.35,16.15 -13.35,7.133